# EAGLE board valhalla_v0.2 (EAGLE 6.5.0)
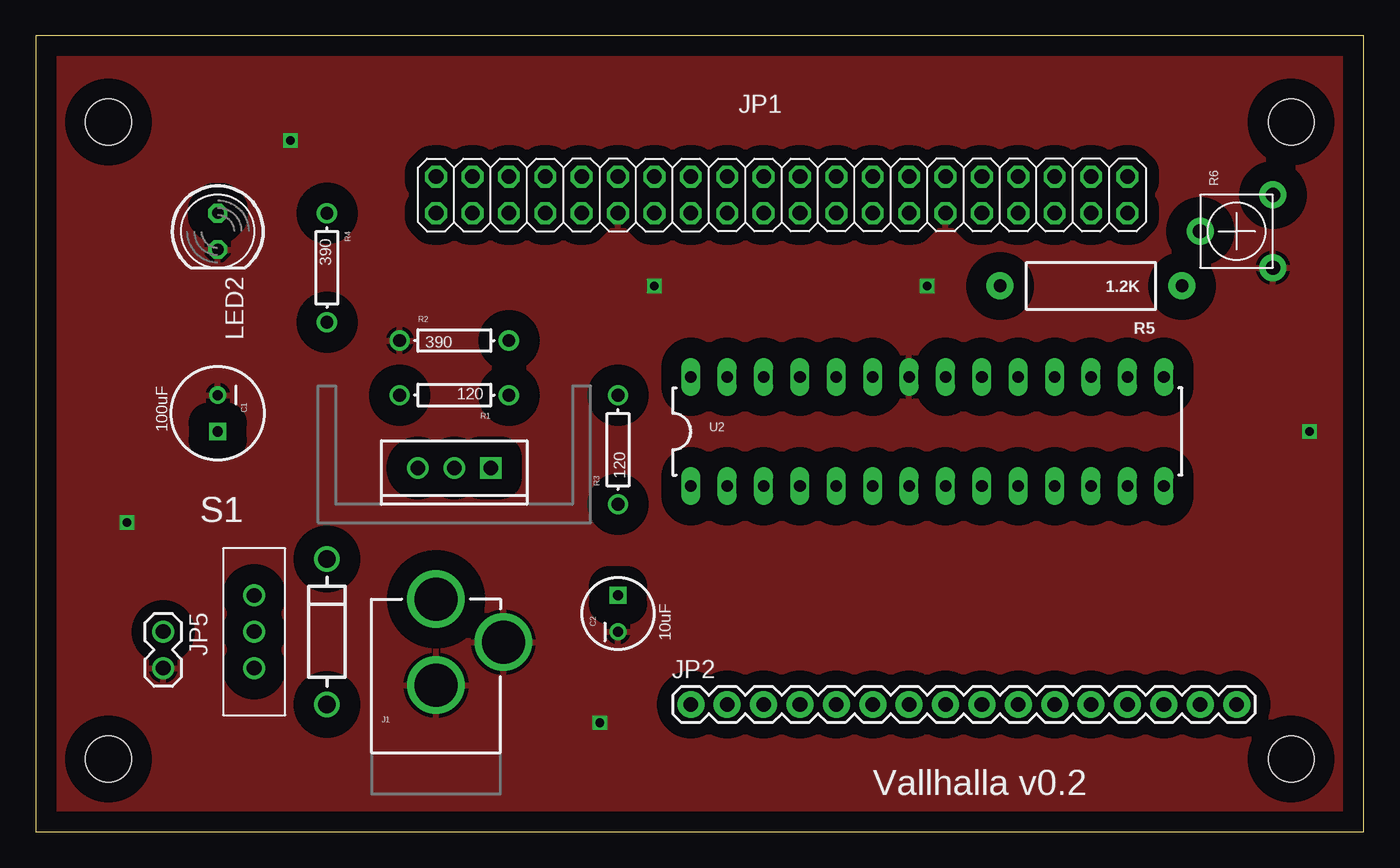
[diagram p0: board, top side]
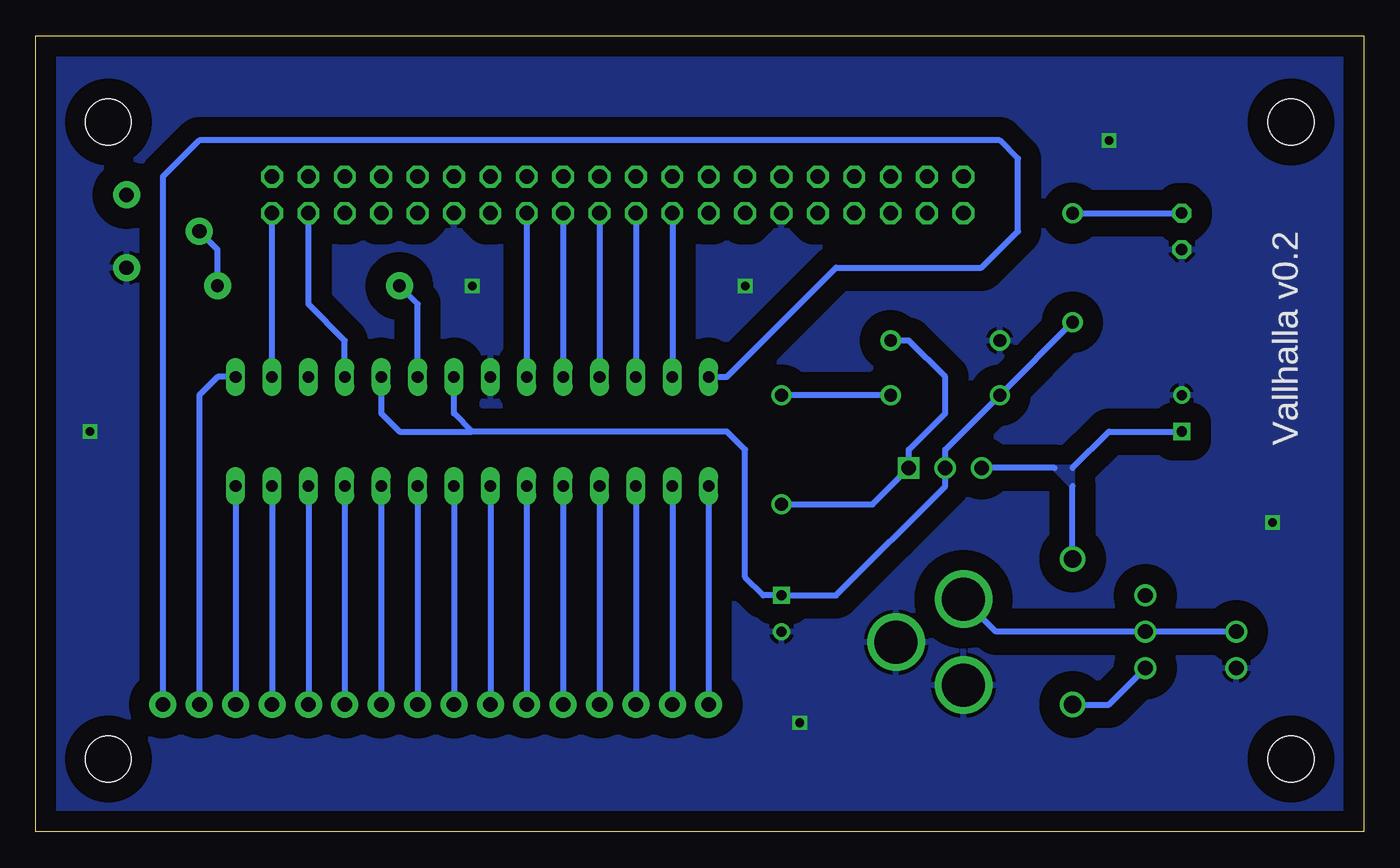
[diagram p1: board, bottom side, seen from below]

Size 92.69 x 55.55 mm. Coordinates in mm from the lower left corner, seen from the top.
Outline: 0,0 92.69,0 92.69,55.55 0,55.55 0,0
Copper layers (1*16): Top 0.035mm / dielectric 1.5mm / Bottom 0.035mm
Design rules "default": minimum track width 10mil, minimum drill 24mil, track to track 8mil, track to pad 8mil, pad to pad 8mil, via to via 8mil, smd to smd 8mil, copper to edge 40mil, drill to drill 8mil, minimum pad ring 10mil, minimum via ring 8mil, stop-mask expansion 4mil, vias tented up to drill 0mil, thermal gap 10mil
Net classes: 0 default: width 0.254 mm
Holes 3.2 mm at 5.08,49.53 87.63,49.53 87.63,5.08 5.08,5.08

## Footprints (pad centres in the part's own frame; a part is rotated, then mirrored left to right if it is on the bottom)
CPOL-RADIAL-100UF-25V = drill 0.7 square: 1 1.27,0 | drill 0.7: 2 -1.27,0
CPOL-RADIAL-10UF-25V = drill 0.7 square: 1 1.27,0 | drill 0.7: 2 -1.27,0
DIODE-0.4 = drill 1.2: A 0,0; C 10.16,0
POWER_JACK_PTH = drill 2.997: GND 0,7.7; GNDBREAK 4.7,10.7; PWR 0,13.7
2X20 = drill 1.016 octagon: 1 -24.13,-1.27; 2 -24.13,1.27; 3 -21.59,-1.27; 4 -21.59,1.27; 5 -19.05,-1.27; 6 -19.05,1.27; 7 -16.51,-1.27; 8 -16.51,1.27; 9 -13.97,-1.27; 10 -13.97,1.27; 11 -11.43,-1.27; 12 -11.43,1.27; 13 -8.89,-1.27; 14 -8.89,1.27; 15 -6.35,-1.27; 16 -6.35,1.27; 17 -3.81,-1.27; 18 -3.81,1.27; 19 -1.27,-1.27; 20 -1.27,1.27; 21 1.27,-1.27; 22 1.27,1.27; 23 3.81,-1.27; 24 3.81,1.27; 25 6.35,-1.27; 26 6.35,1.27; 27 8.89,-1.27; 28 8.89,1.27; 29 11.43,-1.27; 30 11.43,1.27; 31 13.97,-1.27; 32 13.97,1.27; 33 16.51,-1.27; 34 16.51,1.27; 35 19.05,-1.27; 36 19.05,1.27; 37 21.59,-1.27; 38 21.59,1.27; 39 24.13,-1.27; 40 24.13,1.27
1X16 = drill 1.016 pad 1.88: 1 0,0; 2 2.54,0; 3 5.08,0; 4 7.62,0; 5 10.16,0; 6 12.7,0; 7 15.24,0; 8 17.78,0; 9 20.32,0; 10 22.86,0; 11 25.4,0; 12 27.94,0; 13 30.48,0; 14 33.02,0; 15 35.56,0; 16 38.1,0
1X02 = drill 1.016: 1 0,0; 2 2.54,0
LED5MM = drill 0.813 octagon: A -1.27,0; K 1.27,0
AXIAL-0.3 = drill 0.9: P$1 -3.81,0; P$2 3.81,0
AXIAL-0.5 = drill 0.9 pad 1.88: P$1 -6.35,0; P$2 6.35,0
TRIM_POT_PTH = drill 1 pad 1.88: 1 -2.54,-2.54; 2 0,2.54; 3 2.54,-2.54
SWITCH-SPST = drill 1.016: 1 0,2.54; 2 0,0; 3 0,-2.54
TO220-ADJ = drill 1 square: ADJ -2.54,0 | drill 1: IN 2.54,0; OUT 0,0
DIL28-3 = drill 0.813 long: 1 -16.51,-3.81; 2 -13.97,-3.81; 3 -11.43,-3.81; 4 -8.89,-3.81; 5 -6.35,-3.81; 6 -3.81,-3.81; 7 -1.27,-3.81; 8 1.27,-3.81; 9 3.81,-3.81; 10 6.35,-3.81; 11 8.89,-3.81; 12 11.43,-3.81; 13 13.97,-3.81; 14 16.51,-3.81; 15 16.51,3.81; 16 13.97,3.81; 17 11.43,3.81; 18 8.89,3.81; 19 6.35,3.81; 20 3.81,3.81; 21 1.27,3.81; 22 -1.27,3.81; 23 -3.81,3.81; 24 -6.35,3.81; 25 -8.89,3.81; 26 -11.43,3.81; 27 -13.97,3.81; 28 -16.51,3.81

## Placement (x,y rotation side)
C1  100uF  [CPOL-RADIAL-100UF-25V]  12.7,29.21 270 top
C2  10uF  [CPOL-RADIAL-10UF-25V]  40.64,15.24 90 top
D1  1N4001  [DIODE-0.4]  20.32,8.89 90 top
J1  POWER_JACKPTH  [POWER_JACK_PTH]  27.94,2.54 0 top
JP1  [2X20]  52.07,44.45 180 top
JP2  M16PTH  [1X16]  45.72,8.89 0 top
JP5  [1X02]  8.89,13.97 270 top
LED2  Power  [LED5MM]  12.7,41.91 270 top
R1  120  [AXIAL-0.3]  29.21,30.48 180 top
R2  390  [AXIAL-0.3]  29.21,34.29 0 top
R3  120  [AXIAL-0.3]  40.64,26.67 90 top
R4  390  [AXIAL-0.3]  20.32,39.37 270 top
R5  1.2K  [AXIAL-0.5]  73.66,38.1 180 top
R6  TRIMPOTPTH  [TRIM_POT_PTH]  83.82,41.91 90 top
S1  On/Off  [SWITCH-SPST]  15.24,13.97 0 top
U1  LM317  [TO220-ADJ]  29.21,25.4 180 top
U2  TLC5940-NT  [DIL28-3]  62.23,27.94 0 top

## Library data of the parts
C1 C2 D1 J1 JP5 R1-R4 S1 U1 = SparkFun
JP1 = adafruit
JP2 = SparkFun-Connectors
LED2 = SparkFun-Nate
R5 = SparkFun-Resistors
R6 = SparkFun-Electromechanical
U2 = SparkFun-DigitalIC

## Nets
BLANK: JP1.16 U2.23
GND: C1.2 C2.2 J1.GND J1.GNDBREAK JP1.12 JP1.30 JP5.2 LED2.K R2.P$1 R6.1 U2.22
GSCLK: JP1.4 U2.18
IREF: R5.P$2 U2.20
N$1: JP2.1 U2.1
N$2: D1.A S1.3
N$3: J1.PWR JP5.1 S1.2
N$4: JP2.2 U2.2
N$5: R5.P$1 R6.2
N$6: JP2.3 U2.3
N$7: JP2.4 U2.4
N$8: LED2.A R4.P$1
N$9: JP2.5 U2.5
N$10: JP2.6 U2.6
N$11: JP2.7 U2.7
N$12: JP2.8 U2.8
N$13: JP2.9 U2.9
N$14: JP2.10 U2.10
N$15: JP2.11 U2.11
N$16: JP2.12 U2.12
N$17: JP2.13 U2.13
N$18: JP2.14 U2.14
N$19: JP2.15 U2.15
N$20: JP2.16 U2.28
N$22: R1.P$1 R3.P$2
N$24: R2.P$2 R3.P$1 U1.ADJ
RAW: C1.1 D1.C U1.IN
SCLK: JP1.20 U2.25
SIN: JP1.22 U2.26
VCC: C2.1 R1.P$2 R4.P$2 U1.OUT U2.19 U2.21
VPRG: JP1.24 U2.27
XERR: JP1.2 U2.16
XLAT: JP1.18 U2.24

## Tracks (layer width: path | path; a pad name or v marks a point on that pad's centre or on a via)
BLANK
  Bottom 0.406: JP1.16 U2.23
GND  (via drill 0.6)
  other vias: 6.35,21.59 17.78,48.26 39.37,7.62 88.9,27.94 43.18,38.1 62.23,38.1
  pour Bottom (isolate 1.422): 0,55.88 0,0 92.71,0 92.71,55.88
  pour Top (isolate 1.422): 0,55.88 0,0 92.71,-1.27 92.71,57.15
GSCLK
  Bottom 0.406: U2.18 71.12,34.29 73.66,36.83 JP1.4
IREF
  Bottom 0.406: U2.20 66.04,36.83 R5.P$2
N$1
  Bottom 0.406: U2.1 JP2.1
N$2
  Bottom 0.406: D1.A 17.78,8.89 S1.3
N$3
  Bottom 0.406: JP5.1 S1.2 25.67,13.97 J1.PWR
N$4
  Bottom 0.406: U2.2 JP2.2
N$5
  Bottom 0.406: R5.P$1 80.01,40.64 R6.2
N$6
  Bottom 0.406: U2.3 JP2.3
N$7
  Bottom 0.406: U2.4 JP2.4
N$8
  Bottom 0.406: R4.P$1 LED2.A
N$9
  Bottom 0.406: U2.5 JP2.5
N$10
  Bottom 0.406: U2.6 JP2.6
N$11
  Bottom 0.406: U2.7 JP2.7
N$12
  Bottom 0.406: U2.8 JP2.8
N$13
  Bottom 0.406: U2.9 JP2.9
N$14
  Bottom 0.406: U2.10 JP2.10
N$15
  Bottom 0.406: U2.11 JP2.11
N$16
  Bottom 0.406: U2.12 JP2.12
N$17
  Bottom 0.406: U2.13 JP2.13
N$18
  Bottom 0.406: U2.14 JP2.14
N$19
  Bottom 0.406: U2.15 80.01,31.75 81.28,30.48 JP2.15
N$20
  Bottom 0.406: U2.28 44.45,31.75 36.83,39.37 26.67,39.37 24.13,41.91 24.13,46.99 25.4,48.26 81.28,48.26 83.82,45.72 JP2.16
N$22
  Bottom 0.406: R1.P$1 R3.P$2
N$24
  Bottom 0.406: R3.P$1 34.29,22.86 U1.ADJ 31.75,26.67 29.21,29.21 29.21,31.75 31.75,34.29 R2.P$2
RAW
  Bottom 0.406: D1.C 20.32,24.13 | C1.1 17.78,27.94 20.32,25.4 | 21.59,25.4 U1.IN
  pour Bottom: 20.32,24.13 20.32,25.4 21.59,25.4
SCLK
  Bottom 0.406: JP1.20 U2.25
SIN
  Bottom 0.406: JP1.22 U2.26
VCC
  Bottom 0.406: R4.P$2 R1.P$2 29.21,26.67 U1.OUT 29.21,24.13 36.83,16.51 C2.1 41.91,16.51 43.18,17.78 43.18,26.67 44.45,27.94 62.23,27.94 | 62.23,27.94 63.5,29.21 U2.21 | U2.19 68.58,29.21 67.31,27.94 62.23,27.94
VPRG
  Bottom 0.406: JP1.24 U2.27
XERR
  Bottom 0.406: U2.16 JP1.2
XLAT
  Bottom 0.406: JP1.18 U2.24

## Text on the board
tPlace: Vallhalla v0.2
bPlace: Vallhalla v0.2